# Altium PCB Bee Hive MainBoard PCB.PcbDoc
Units mm, origin at the board's own origin, x right, y up, seen from the top; angles counter-clockwise.
Board outline 90 x 57 mm, 2 copper layers (Top Layer, Bottom Layer), stack 1.671 mm thick; 26 components, 30 nets, 132 pads, 32 vias.
Unrouted connection lines stored in the file: 173.
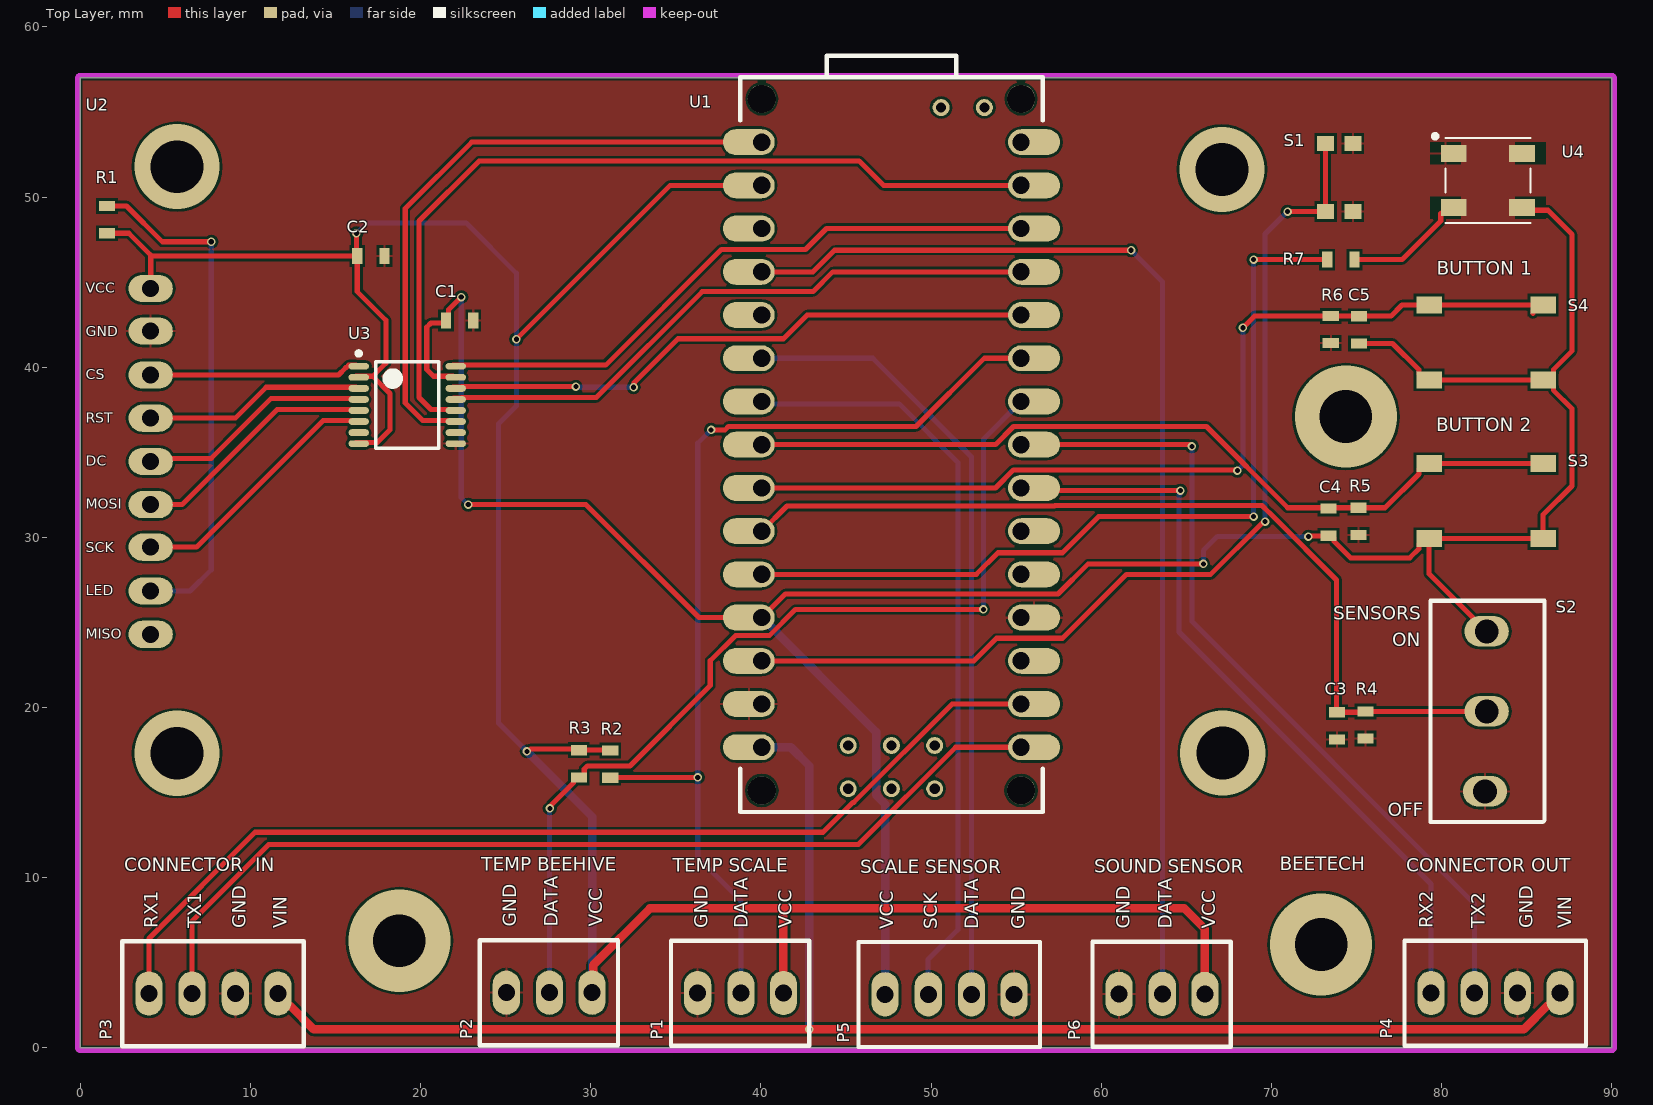
[diagram p0: Top Layer view]
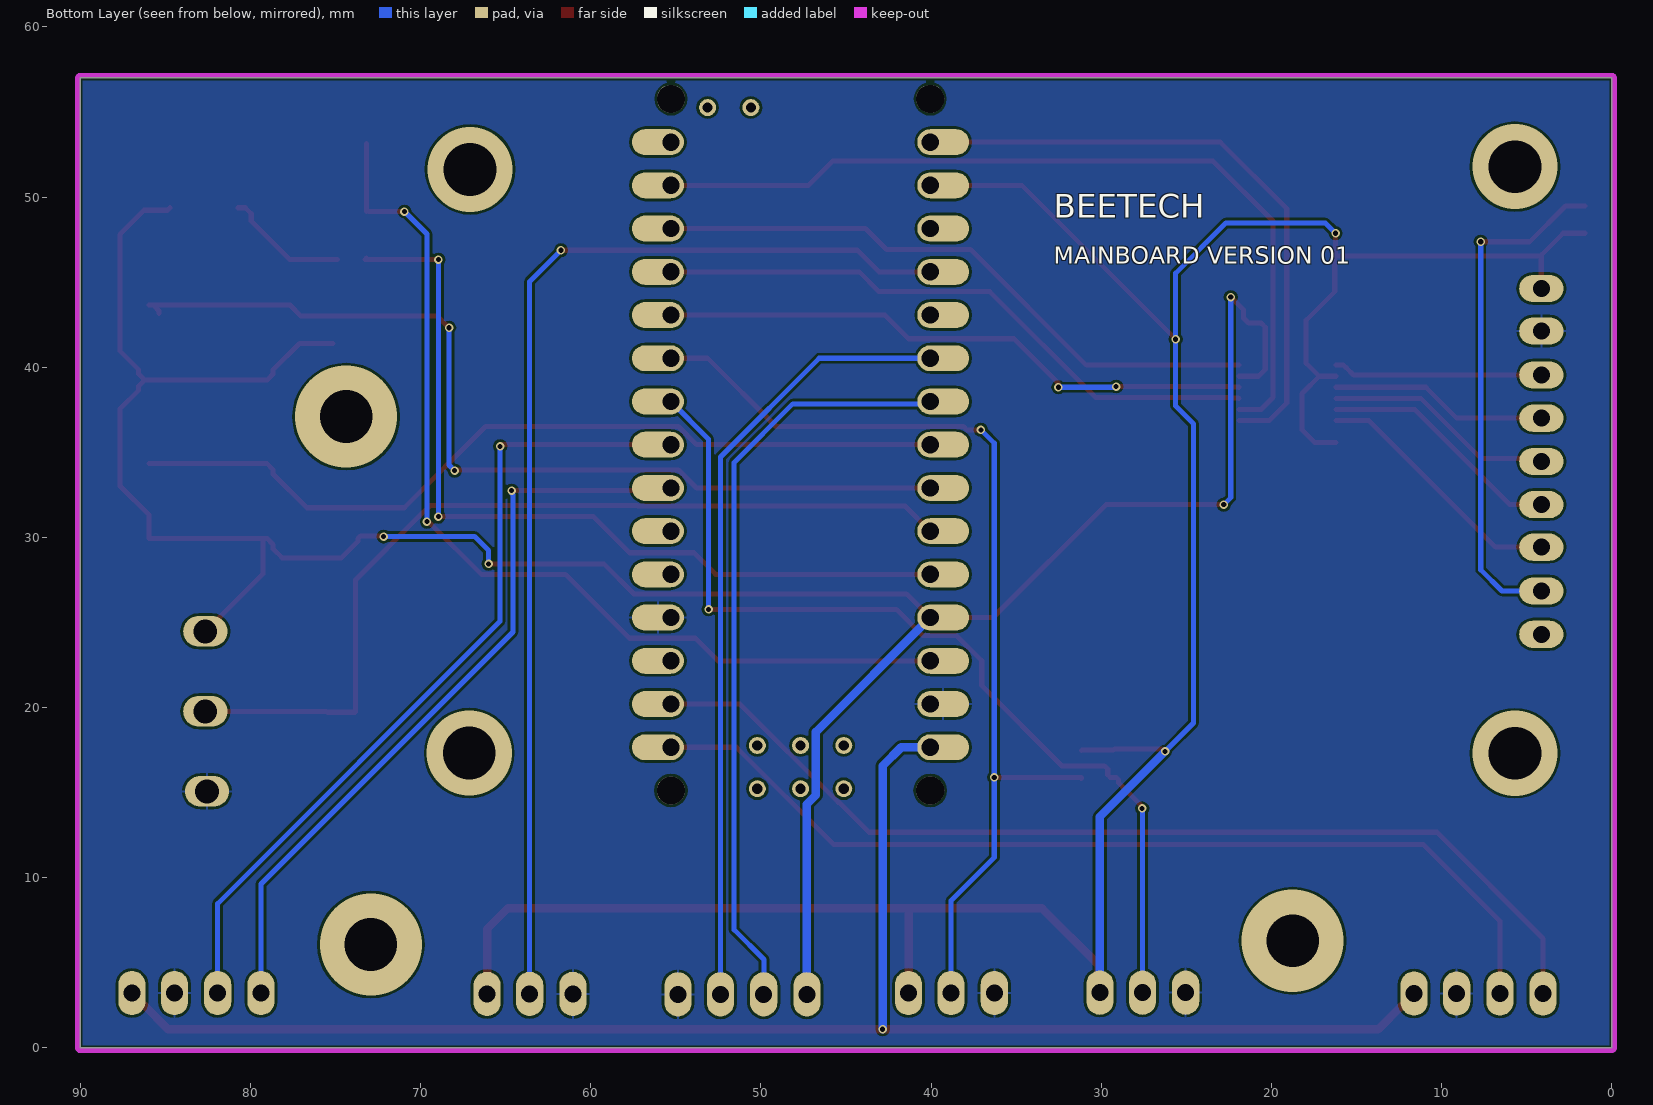
[diagram p1: Bottom Layer view, seen from below]
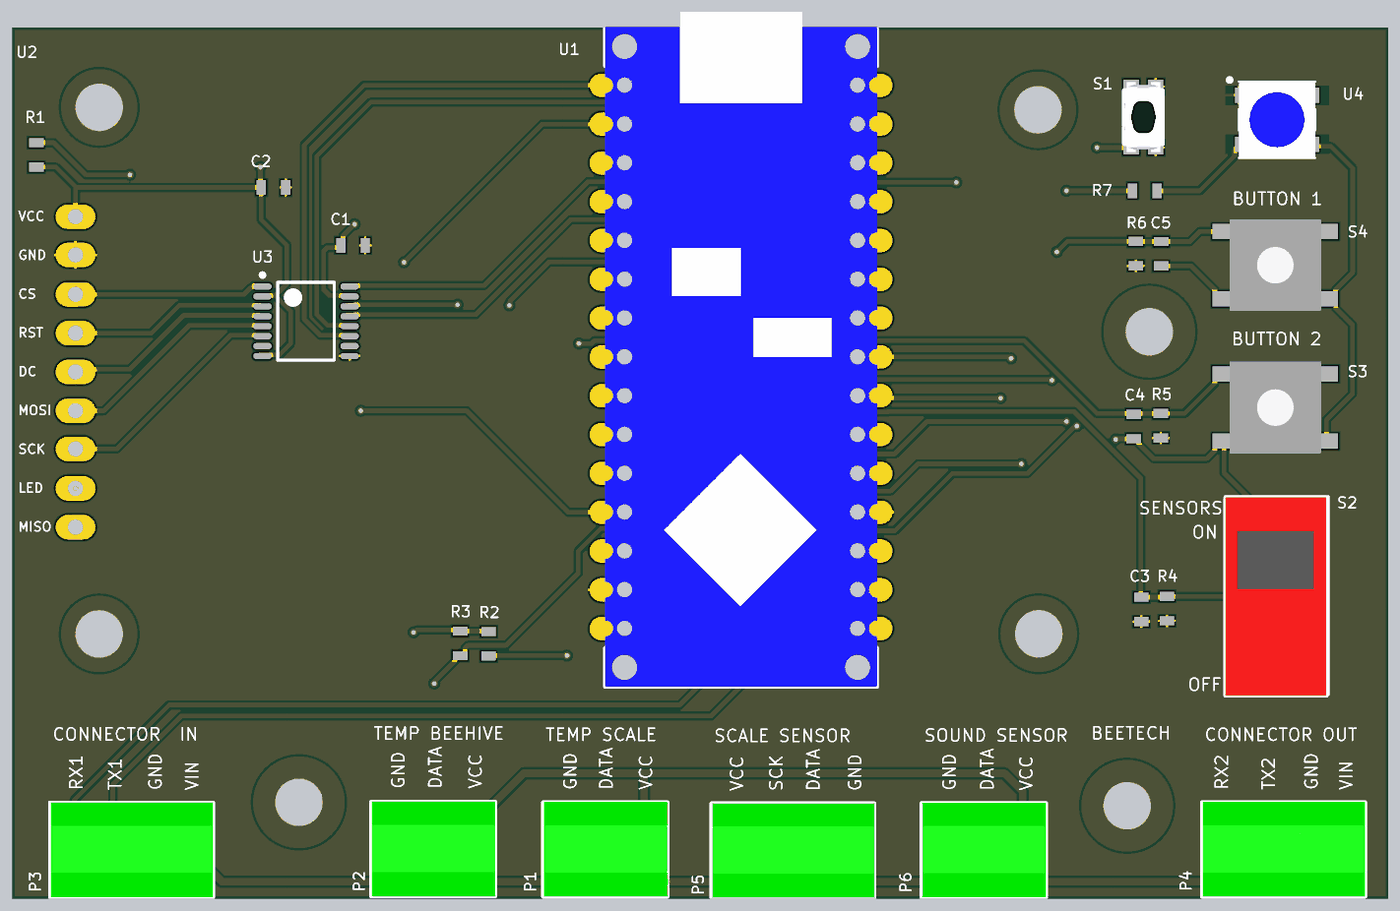
[diagram p2: 3D render of the assembled board from above, using the file's embedded part models]

## Layer stack, top to bottom
Top Solder: solder mask 0.0102, Solder Resist, Dk 3.5
Top Layer: signal copper 0.0356
Dielectric1: core 1.6, FR-4, Dk 4.8
Bottom Layer: signal copper 0.0356
Bottom Solder: solder mask 0.0102, Solder Resist, Dk 3.5

## Board outline
0,0 90,0 90,57 0,57

## Design rules (kind name [scope] priority, off if disabled: settings)
Clearance Clearance_1 [InNamedPolygon('SW_L01_P024')] p1: gap=0.254 ignorepadtopadclearanceinfootprint=FALSE except(0: Arc-Hole Track-Hole SMDPad-Hole THPad-Hole Via-Hole Fill-Hole Poly-Hole Region-Hole Text-Hole)
Clearance [All] p2: gap=0.15 ignorepadtopadclearanceinfootprint=FALSE
ComponentClearance [All] p1: gap=0.001 collisioncheckmode=3 verticalgap=0.254 showdistances=FALSE
FabricationTestPointUsage [All] p1 off: valid=0 allowmultiple=FALSE
FabricationTestpoint [All] p1 off: side=3 testpointundercomponent=TRUE minsize=1.016 maxsize=2.54 preferedsize=1.524 minholesize=0 maxholesize=1.016 preferedholesize=0.813 testpointgrid=0.025 allowsidetop=TRUE allowsidebottom=TRUE usegrid=TRUE gridtolerance=0
HoleSize [All] p1: absolutevalues=TRUE maxlimit=6 minlimit=0.025 maxpercent=80.000 minpercent=20.000
HoleToHoleClearance [All] p1: gap=0 allowstackedmicrovias=TRUE
MinimumSolderMaskSliver [All] p1: minsoldermaskwidth=0
PolygonConnect PolygonConnect_14 [All vs IsNamedPolygon('GND_L01_P041')] p1: connectstyle=Relief reliefconductorwidth=0.15 reliefentries=4 polygonreliefangle="90 Angle" airgapwidth=0.15
PolygonConnect V_BAT_L01_P036 [All vs IsNamedPolygon('V_BAT_L01_P036')] p2: connectstyle=Direct reliefconductorwidth=0.254 reliefentries=4 polygonreliefangle="90 Angle" airgapwidth=0.254
PolygonConnect V_BAT2 [All vs IsNamedPolygon('V_BAT2_L01_P004')] p3: connectstyle=Direct reliefconductorwidth=0.254 reliefentries=4 polygonreliefangle="90 Angle" airgapwidth=0.254
PolygonConnect V_BAT [All vs IsNamedPolygon('V_BAT_L01_P010')] p4: connectstyle=Direct reliefconductorwidth=0.254 reliefentries=4 polygonreliefangle="90 Angle" airgapwidth=0.254
PolygonConnect V_SYS2 [All vs IsNamedPolygon('V_SYS2_L01_P012')] p5: connectstyle=Direct reliefconductorwidth=0.254 reliefentries=4 polygonreliefangle="90 Angle" airgapwidth=0.254
PolygonConnect +3.3b_uBlox [All vs IsNamedPolygon('+3.3V_UBLOX_L01_P014')] p6: connectstyle=Direct reliefconductorwidth=0.254 reliefentries=4 polygonreliefangle="90 Angle" airgapwidth=0.254
PolygonConnect V_LIPO_SYS_L01_P016 [All vs IsNamedPolygon('V_LIPO_SYS_L01_P016')] p7: connectstyle=Direct reliefconductorwidth=0.254 reliefentries=4 polygonreliefangle="90 Angle" airgapwidth=0.254
PolygonConnect V_LIPO_SYS_L01_P020 [All vs IsNamedPolygon('V_LIPO_SYS_L02_P020')] p8: connectstyle=Direct reliefconductorwidth=0.254 reliefentries=4 polygonreliefangle="90 Angle" airgapwidth=0.254
PolygonConnect V_SYS_L02_P024 [All vs IsNamedPolygon('V_SYS_L02_P024')] p9: connectstyle=Direct reliefconductorwidth=0.254 reliefentries=4 polygonreliefangle="90 Angle" airgapwidth=0.254
PolygonConnect VCC_USB_5.0V_L01_P026 [All vs IsNamedPolygon('VCC_USB_5.0V_L01_P026')] p10: connectstyle=Direct reliefconductorwidth=0.254 reliefentries=4 polygonreliefangle="90 Angle" airgapwidth=0.254
PolygonConnect SW [All vs IsNamedPolygon('SW_L01_P008')] p11: connectstyle=Direct reliefconductorwidth=0.254 reliefentries=4 polygonreliefangle="90 Angle" airgapwidth=0.254
PolygonConnect [All] p12: connectstyle=Relief reliefconductorwidth=0.15 reliefentries=4 polygonreliefangle="90 Angle" airgapwidth=0.15
RoutingVias [All] p1: holewidth=0.3 width=0.5 viastyle="Through Hole" minholewidth=0.2 minwidth=0.3 maxholewidth=1.2 maxwidth=2 useviatemplates=TRUE viatemplateguid#1={68F519FB-439D-452A-8ACF-2DE296BA9197} viatemplateguid#2={5ED9683F-E5DF-4E78-BDB1-49E541A8EC46} viatemplateguid#3={FAFF2F81-81C9-46E2-9D3D-D8AEF9417303} viatemplateguid#4={175E6F9D-763D-42D4-A59E-C21ACC7DA2E1} viatemplatename#1=v50h30m0mx0 viatemplatename#2=v50h30m50mx0 viatemplatename#3=v50h20 viatemplatename#4=v50h20mx0
SilkToSilkClearance [All] p1: silktosilkclearance=0.152
SilkToSolderMaskClearance [IsPad] p1: minsilkscreentomaskgap=0.127 clearancetoexposedcopper=TRUE
SolderMaskExpansion [All] p1: expansion=0.102 istentingtop=FALSE
Width [All] p1: maxlimit=5.08 minlimit=0.01 preferedwidth=0.305 minimp=50.000000 maximp=50.000000 favimp=50.000000
22 further rules are at their usual default settings.

## Components (designator, comment, footprint, x,y, rotation, side; value= is the part's Value field where it differs from the comment)
C1 "100nF 0603_1" "CAP 0603" 22.294,42.753 r180 top value=100nF
C2 "100nF 0603_1" "CAP 0603" 17.081,46.542 r180 top value=100nF
C3 "100nF 0603" "CAP 0603" 73.85,18.925 r270 top value=100nF
C4 "100nF 0603" "CAP 0603" 73.348,30.895 r90 top value=100nF
C5 "100nF 0603" "CAP 0603" 75.149,42.202 r90 top value=100nF
P1 "3-Pin Right Angle Housing" "3PIN - RND 205-EK254-2.54-03P" 41.325,3.225 r270 top
P2 "3-Pin Right Angle Housing" "3PIN - RND 205-EK254-2.54-03P" 30.078,3.25 r270 top
P3 "4-Pin Right Angle Housing" "4PIN - RND 205-EK254-2.54-04P" 11.615,3.2 r270 top
P4 "4-Pin Right Angle Housing" "4PIN - RND 205-EK254-2.54-04P" 86.965,3.225 r270 top
P5 "4-Pin Right Angle Housing" "4PIN - RND 205-EK254-2.54-04P" 54.875,3.15 r270 top
P6 "3-Pin Right Angle Housing" "3PIN - RND 205-EK254-2.54-03P" 66.09,3.175 r270 top
R1 "0 Ohm 0603" "RES 0603 FOOTPRINT" 1.575,48.675 r270 top value=0
R2 "4.7k Ohm 0603" "RES 0603 FOOTPRINT" 31.15,16.675 r270 top value=4.7k
R3 "4.7k Ohm 0603" "RES 0603 FOOTPRINT" 29.3,16.7 r270 top value=4.7k
R4 "1k Ohm 0603" "RES 0603 FOOTPRINT" 75.525,18.978 r90 top value=1k
R5 "10k Ohm 0603" "RES 0603 FOOTPRINT" 75.123,30.945 r90 top value=10k
R6 "10k Ohm 0603" "RES 0603 FOOTPRINT" 73.489,42.22 r90 top value=10k
R7 "470 Ohm 0603" "RES 0603 FOOTPRINT" 74.075,46.325 r0 top value=470
S1 "Taster Print_SMD_2" "Taster Print - SMD - KMR241G LFS" 73.989,51.15 r270 top
S2 "Schiebeschalter 7A11-A1PCAE2" "schiebeschalter 7A11-A1PCAE2" 82.65,19.778 r0 top
S3 "Taster Print_SMD_3" "Taster Print RND 210-00212" 82.616,32.134 r0 top
S4 "Taster Print_SMD_3" "Taster Print RND 210-00212" 82.616,41.456 r0 top
U1 "Arduino Nano Every" "Arduino Nano Every" 38.78,57.04 r270 top locked
U2 "TFT 2.2 SPI 240x320" "TFT 2.2 SPI 240x320" 4.14,44.628 r0 top locked
U3 "TXB0106" TSSOP-16L 19.217,37.785 r0 top locked
U4 "neoPixel" "neoPixel 5050 adafruit 1655" 82.725,50.975 r180 top

## Footprints (in the part's own frame and the unit in brackets; to place one, negate y for a bottom-side part, rotate by r counter-clockwise, add the part's x,y. Pads: shape width x height; smd on the part's side, far side on the other; paste and mask are expansions set on the pad)
"3PIN - RND 205-EK254-2.54-03P" [mm] "RND 205-EK254-2.54-03P"
  oval 2.6x1.6 hole 1: 1(0,0) 2(0,-2.5) 3(0,-5.04)
  silkscreen extent -3.07,-6.6 3.1,1.52, body extent -3.1,-6.55 3.1,1.53, height 8.51
"4PIN - RND 205-EK254-2.54-04P" [mm] "RND 205-EK254-2.54-04P"
  oval 2.6x1.6 hole 1: 1(0,0) 2(0,-2.5) 3(0,-5.04) 4(0,-7.58)
  silkscreen extent -3.07,-9.14 3.1,1.52, body extent -3.1,-9.1 3.1,1.52, height 8.51
"Arduino Nano Every" [mil] "Arduino Nano Every"
  oval 60x120 hole 40 copper offset 0,-30: 1(150,50) 2(250,50) 3(350,50) 4(450,50) 5(550,50) 6(650,50) 7(750,50) 8(850,50) 9(950,50) 10(1050,50) 11(1150,50) 12(1250,50) 13(1350,50) 14(1450,50) 15(1550,50)
  oval 60x120 hole 40 copper offset 0,30: 16(1550,650) 16(1550,650) 17(1450,650) 18(1350,650) 19(1250,650) 20(1150,650) 21(1050,650) 22(950,650) 23(850,650) 24(750,650) 25(650,650) 26(550,650) 27(450,650) 28(350,650) 29(250,650) 30(150,650)
  round 39.37 hole 23.62: 50(70,565) 51(70,465) 61(1545.98,250) 62(1645.98,250) 63(1545.98,350) 64(1645.98,350) 65(1545.98,450) 66(1645.98,450)
  round 65 hole 65 unplated: MH1(50,650) MH2(50,50) MH3(1650,50) MH4(1650,650)
  silkscreen extent -50,0 1700,700, body extent -40,0 1700,700, height 136
"CAP 0603" [mm] "CAP 0603"
  rect 0.6x0.95 smd: 1(-0.8,0) 2(0.8,0)
  body extent -0.8,-0.4 0.8,0.4, height 0.8
"neoPixel 5050 adafruit 1655" [mm] "neoPixel 5050 adafruit 1655"
  rect 1.5x1 smd: 1(2,-1.6) 2(2,1.6) 3(-2,1.6) 4(-2,-1.6)
  silkscreen extent -2.5,-2.72 3.22,2.5, body extent -2.5,-2.5 2.5,2.5, height 2
"RES 0603 FOOTPRINT" [mm] "RES 0603 FOOTPRINT"
  rect 0.6x0.95 smd: 1(-0.8,0) 2(0.8,0)
  body extent -0.8,-0.4 0.8,0.4, height 0.8
"schiebeschalter 7A11-A1PCAE2" [mm] "schiebeschalter 7A11-A1PCAE2"
  oval 2.6x1.8 hole 1.4: 1(0,4.7) 2(0,0) 3(-0.1,-4.7)
  silkscreen extent -3.3,-6.5 3.4,6.5, body extent -3.3,-6.5 3.3,6.5, height 12.15
"Taster Print - SMD - KMR241G LFS" [mm] "http://ch.farnell.com/c-k-components/kmr241g-lfs/taster-smd-4n/dp/1437637"
  rect 0.9x1 smd: 1(-2,0.8) 2(-2,-0.8) 10(2,0.8) 20(2,-0.8)
  body extent -2.3,-1.4 2.3,1.4, height 1.93
"Taster Print RND 210-00212" [mm] "Taster Print RND 210-00212"
  rect 1.5x1 smd: 1(-3.35,2.2) 2(-3.35,-2.2) 3(3.35,2.2) 4(3.35,-2.2)
  body extent -3,-3 3,3, height 9.51
"TFT 2.2 SPI 240x320" [mm]
  oval 2.6x1.6 hole 1: 1(0,0) 2(0,-2.5) 3(0,-5.08) 4(0,-7.62) 5(0,-10.16) 6(0,-12.7) 7(0,-15.2) 8(0,-17.78) 9(0,-20.32)
  body extent -1.52,-30.16 65.98,9.84, height 14.41
TSSOP-16L [mm] "TSOP, 16-Leads, Body 5,00x4,40mm, Pitch 0,65mm, IPC High Density"
  oval 1.2x0.4 smd: 1(-2.85,2.275) 2(-2.85,1.625) 3(-2.85,0.975) 4(-2.85,0.325) 5(-2.85,-0.325) 6(-2.85,-0.975) 7(-2.85,-1.625) 8(-2.85,-2.275) 9(2.85,-2.275) 10(2.85,-1.625) 11(2.85,-0.975) 12(2.85,-0.325) 13(2.85,0.325) 14(2.85,0.975) 15(2.85,1.625) 16(2.85,2.275)
  silkscreen extent -2.97,-2.55 1.85,3.15, body extent -2.25,-2.55 2.25,2.55, height 1.2

## Part data
C1 C2 C3 C4 C5: "C CERAMIC SMD", Bezeichnung="C SMD", Haendler=Mouser, housing/footprint=0603
  C1 C2: Haendler Nr=603-CC0603JPX79BB104, Hersteller=Yageo, Hersteller Nr=CC0603JPX7R9BB104, Preis (CHF)=0.15, Umax=50V
  C3 C4 C5: Haendler Nr=710-885012206020, Hersteller=Würth, Hersteller Nr=885012206020, Preis (CHF)=0.05, Umax=10V
P1 P2 P6: library part "3-Pin Screw Terminal", "3-Pin", ComponentLink1Description=Mouser, ComponentLink1URL=https://www.mouser.ch/ProductDetail/TE-Connectivity/640453-2?qs=sGAEpiMZZMs%252bGHln7q6pm5E1Eb6qwPl2KIU5TYv3tVY%3d, Haendler=Distrelec, Haendler Nr=301-27-919, Preis (CHF)=0.60
P3 P4 P5: library part "4-Pin Screw Terminal", "4-Pin", ComponentLink1Description=Mouser, ComponentLink1URL=https://www.mouser.ch/ProductDetail/TE-Connectivity/640453-2?qs=sGAEpiMZZMs%252bGHln7q6pm5E1Eb6qwPl2KIU5TYv3tVY%3d, Haendler=Distrelec, Haendler Nr=301-27-920, Hersteller=RND, Hersteller Nr="RND 205-EK254-2.54-04P", Preis (CHF)=0.60
R1 R2 R3 R4 R5 R6 R7: "R SMD", Bezeichnung="R SMD", Haendler=Mouser, housing/footprint=0603
  R1: Haendler Nr=667-ERJ-3GEY0R00V, Hersteller=ERJ-3GEY0R00V, Hersteller Nr=Panasonic, Preis (CHF)=0.01
  R2 R3: Haendler Nr=755-ESR03EZPF4701, Preis (CHF)=0.01
  R4: Haendler Nr=71-CRCW06031K00FKEAC, Hersteller Nr=CRCW06031K00FKEAC, Preis (CHF)=0.01
  R5 R6: Haendler Nr=603-AC0603FR-0710KL, Hersteller=Yageo, Hersteller Nr=AC0603FR-0710KL, Preis (CHF)=0.01
  R7: Haendler Nr=594-MCT06030C4700FP5, Preis (CHF)=0.15
S1: "Taster", Haendler=Mouser, Haendler2=Farnell, Haendler2 Nr=1437637, Haendler Nr=611-KMR241GLFS, Hersteller=C&K, Hersteller Nr="KMR241G LFS", link=http://ch.farnell.com/c-k-components/kmr241g-lfs/taster-smd-4n/dp/1437637, Link Hersteller=http://www.ckswitches.com/products/switches/product-details/Tactile/KMR2/KMR241NGLFS/, Preis (CHF)=0.5
S3 S4: library part "Taster Print_SMD_5", "Taster", ComponentLink1Description=link, ComponentLink1URL=https://www.digikey.ch/product-detail/de/wurth-electronics-inc/430473035826/732-7021-1-ND/5225469, Haendler=Distrelec, Haendler Nr=300-90-668, link=https://www.distrelec.ch/de/printtaster-210-schliesser-45n-6mm-rnd-components-rnd-210-00212/p/30090668?q=PRINTTASTER&pos=2&origPos=45&origPageSize=100&track=true, Preis (CHF)=0.38
U1: "https://store.arduino.cc/nano-every-pack", ComponentLink3URL=http://ch.farnell.com/stmicroelectronics/stm32l496vgt6/mcu-arm-cortex-m4-80mhz-lqfp-100/dp/2725139?st=STM32L496VGT6, Haendler=Mouser, Haendler Nr=782-ABX00028, link=https://store.arduino.cc/nano-every-pack, Link 2=https://www.mouser.ch/ProductDetail/Arduino/ABX00028?qs=PzGy0jfpSMtit6rnFl8mVg%3D%3D, Preis (CHF)=11.21
U2: "https://www.banggood.com/1_441_82_02_22_4-Inch-TFT-LCD-Display-Module-Colorful-Screen-Module-SPI-Interface-p-1494883.html?rmmds=search&ID=6211522&cur_warehouse=CN", ComponentLink3URL=http://ch.farnell.com/stmicroelectronics/stm32l496vgt6/mcu-arm-cortex-m4-80mhz-lqfp-100/dp/2725139?st=STM32L496VGT6, Haendler="Banggood / Aliexpress", link=https://www.banggood.com/1_441_82_02_22_4-Inch-TFT-LCD-Display-Module-Colorful-Screen-Module-SPI-Interface-p-1494883.html?rmmds=search&ID=6211522&cur_warehouse=CN, Link 2=https://de.aliexpress.com/item/4000839144387.html?spm=a2g0o.productlist.0.0.48ed5371jjv3wJ&algo_pvid=f087815a-197e-468a-8055-d99fc6734484&algo_expid=f087815a-197e-468a-8055-d99fc6734484-8&btsid=0ab50f6115912653966648062e4a8e&ws_ab_test=searchweb0_0,searchweb201602_,searchweb201603_, Preis (CHF)=6
U3: library part "TXB0106 Level Converter", "Level Converter TXB0106", Haendler=Mouser, Haendler2=Farnell, Haendler2 Nr=1694679, Haendler Nr=595-TXB0106PWR, Hersteller="Texas Instruments", Hersteller Nr=TXB0106, link=http://ch.farnell.com/texas-instruments/txb0106pwr/txb-transceiver-tssop16/dp/1694679?ost=1694679&searchView=table&iscrfnonsku=false&ddkey=http%3Ade-CH%2FElement14_Switzerland%2Fsearch, Preis (CHF)=1.45
U4: library part "neoPixel 5050 adafruit 1655", "neoPixel 5050 adafruit 1655", ComponentLink1Description=Mouser, ComponentLink1URL=https://www.mouser.ch/ProductDetail/TE-Connectivity/640453-2?qs=sGAEpiMZZMs%252bGHln7q6pm5E1Eb6qwPl2KIU5TYv3tVY%3d, Haendler=Mouser, Haendler Nr=485-1655, Hersteller=Adafruit, Hersteller Nr=1655, Preis (CHF)=0.60
S2: Haendler=Distrelec, Haendler Nr=124-50-166

## Via types
v1: diameter 0.5, hole 0.3, Top Layer to Bottom Layer, tented both sides, 25 vias
v2: diameter 5, hole 3.1, Top Layer to Bottom Layer, tented both sides, 4 vias
v3: diameter 6, hole 3.1, Top Layer to Bottom Layer, 3 vias

## Nets (pads, with @x,y where several pads share a name; then routed paths per layer and width w, separated by ;. In a path a pad name is that pad's centre, name@x,y a point inside that pad or via, vN(x,y) a via of type N, cw(c..) or ccw(c..) an arc to the next point about the centre after c; other vN are vias at no path point)
BUTTON_1: C4.2 R5.2 S3.1 S3.3 U1.8 | length 49.5
  Top Layer w0.3: U1.8 53.788,35.45 54.85,36.512 66.188,36.512 70.955,31.745 73.298,31.745 C4.2 ; C4.2@73.398,31.745 R5.2 76.677,31.745 78.666,33.734 78.666,33.984 79.016,34.334 S3.1 S3.3
BUTTON_2: C5.2 R6.2 S4.1 S4.3 U1.9 | length 55.8
  Top Layer w0.3: U1.9 53.788,32.91 54.85,33.972 67.809,33.972 67.819,33.962 67.96,33.962 v1(67.999,33.924) ; v1(68.325,42.325) 69.02,43.02 R6.2 73.508,43.002 C5.2 77.021,43.002 77.675,43.656 S4.1 S4.3@85.716,43.656 ; S4.3@85.366,43.166 85.366,43.306 S4.3@85.716,43.656 ; S4.3 S4.3@85.716,43.656
  Bottom Layer w0.3: v1(67.999,33.924) 68.325,34.25 v1(68.325,42.325)
CS: U1.28 U3.16 | length 36.7
  Top Layer w0.3: U3.16@21.909,40.125 30.875,40.125 37.675,46.925 42.625,46.925 43.85,48.15 U1.28
"CS TFT": U2.3 U3.1 | length 12.4
  Top Layer w0.3: U2.3@4.171,39.517 U2.3 15.174,39.548 15.602,39.975 15.632,39.975 15.782,40.125 U3.1@16.209,40.125
DATA_TEMP_1: P1.2 R2.2 U1.25 | length 59.7
  Top Layer w0.3: R2.2@31.175,15.85 R2.2 31.175,15.9 v1(36.285,15.9) ; v1(37.075,36.325) 37.899,36.325 38.086,36.512 49.113,36.512 53.131,40.53 U1.25
  Bottom Layer w0.3: v1(37.075,36.325) 36.285,35.535 v1(36.285,15.9) 36.285,11.19 38.825,8.65 P1.2 P1.2@38.775,3.275
DATA_TEMP_2: P2.2 R3.2 U1.24 | length 55.5
  Top Layer w0.3: v1(27.6,14.075) 27.638,14.113 27.638,14.238 28.975,15.575 28.975,15.75 29.125,15.9 R3.2 29.468,15.9 29.618,16.05 29.618,16.393 29.8,16.575 32.3,16.575 37.025,21.3 37.025,22.751 38.502,24.228 40.49,24.228 42.037,25.775 v1(53.075,25.775)
  Bottom Layer w0.3: P2.2 27.578,14.053 v1(27.6,14.075) ; v1(53.075,25.775) 53.075,35.775 U1.24
DC: U1.27 U3.13 | length 36.5
  Top Layer w0.3: U3.13@21.909,38.175 21.928,38.194 22.399,38.194 22.421,38.217 30.326,38.217 36.552,44.444 43.06,44.444 44.226,45.61 U1.27
"DC TFT": U2.5 U3.4 | length 13.6
  Top Layer w0.3: U2.5 4.322,34.65 7.7,34.65 11.225,38.175 U3.4@16.209,38.175
DT_HX711: P5.2 U1.6 | length 46.3
  Bottom Layer w0.3: U1.6 46.573,40.53 52.375,34.728 P5.2
GND: C1.1 C2.1 C3.2 P1.3 P2.3 P3.2 P4.2 P5.1 P6.3 R4.1 R5.1 R6.1 S1.1 S1.10 S2.3 U1.14 U1.19 U2.2 U3.9 U4.1
"LED TFT": R1.1 U2.8 | length 30.3
  Top Layer w0.3: R1.1 2.725,49.475 4.825,47.375 v1(7.7,47.375)
  Bottom Layer w0.3: v1(4.14,26.848) 6.448,26.848 7.7,28.1 v1(7.7,47.375)
MOSI: U1.29 U3.12 | length 50.1
  Top Layer w0.3: U3.12@21.909,37.525 20.613,37.525 19.91,38.228 19.91,48.591 23.444,52.125 45.775,52.125 47.21,50.69 U1.29
"MOSI TFT": U2.6 U3.5 | length 14.4
  Top Layer w0.3: U2.6 4.143,31.925 5.975,31.925 11.575,37.525 U3.5@16.209,37.525
NEO_PIX_DATA: R7.1 U1.11 | length 49.9
  Top Layer w0.3: U1.11 52.655,27.83 53.925,29.1 57.725,29.1 59.85,31.225 v1(68.95,31.225) ; v1(68.95,46.325) R7.1 R7.1@73.175,46.425
  Bottom Layer w0.3: v1(68.95,31.225) v1(68.95,46.325)
NetR7_2: R7.2 U4.2 | length 7.4
  Top Layer w0.3: R7.2 77.675,46.325 79.951,48.601 79.951,49.025 80.301,49.375 U4.2
RESETN: S1.2 S1.20 U1.13 | length 58
  Top Layer w0.3: U1.13 52.525,22.75 53.85,24.075 57.725,24.075 61.48,27.83 66.43,27.83 69.425,30.825 69.471,30.825 69.571,30.925 v1(69.625,30.925) ; v1(70.95,49.15) 73.039,49.15 73.114,49.225 S1.20 S1.2
  Bottom Layer w0.3: v1(69.625,30.925) 69.625,47.825 v1(70.95,49.15)
RST: U1.26 U3.14 | length 35.3
  Top Layer w0.3: U3.14@21.909,38.825 21.928,38.844 22.399,38.844 22.421,38.867 v1(29.125,38.867) ; v1(32.516,38.825) 32.554,38.863 32.554,39.102 35.127,41.675 41.325,41.675 42.72,43.07 U1.26
  Bottom Layer w0.3: v1(29.125,38.867) 29.167,38.825 v1(32.516,38.825)
"RST TFT": U2.4 U3.3 | length 12.8
  Top Layer w0.3: U2.4 9.108,37.008 10.925,38.825 U3.3@16.209,38.825
"RX 1": P3.4 U1.17 | length 60.2
  Top Layer w0.3: P3.4 4.035,6.435 10.275,12.675 43.65,12.675 45.407,14.432 45.461,14.432 51.239,20.21 U1.17
"RX 2": P4.4 U1.22 | length 45.1
  Top Layer w0.3: U1.22 55.45,32.75 v1(64.65,32.75)
  Bottom Layer w0.3: v1(64.65,32.75) 64.612,32.712 64.612,32.57 64.575,32.534 64.575,24.45 79.385,9.64 P4.4
SCK: U1.1 U3.11 | length 37.3
  Top Layer w0.3: U3.11@21.909,36.875 20.126,36.875 19.1,37.901 19.1,49.325 23.005,53.23 U1.1 U1.1@40.03,53.25
"SCK TFT": U2.7 U3.6 | length 15.2
  Top Layer w0.3: U2.7 6.828,29.428 14.275,36.875 U3.6@16.209,36.875
SCK_HX711: P5.3 U1.7 | length 45
  Bottom Layer w0.3: U1.7 40.19,37.85 48.125,37.85 51.573,34.402 51.573,6.948 49.825,5.2 49.825,3.16 P5.3
SOUND_DATA: P6.2 U1.4 | length 66.7
  Top Layer w0.3: U1.4 43.06,45.61 44.325,46.875 v1(61.75,46.875)
  Bottom Layer w0.3: v1(61.75,46.875) 63.59,45.035 P6.2
SWITCH: C3.1 R4.2 S2.2 U1.10 | length 52.8
  Top Layer w0.3: U1.10 41.528,31.848 57.254,31.848 57.281,31.875 69.45,31.875 69.85,31.475 69.853,31.475 70.175,31.153 70.175,31.15 73.825,27.5 73.825,19.75 C3.1 75.472,19.725 R4.2 S2.2
"TX 1": P3.3 U1.16 | length 57.2
  Top Layer w0.3: P3.3 6.575,7.198 6.572,7.201 6.572,7.449 11.073,11.95 45.725,11.95 51.445,17.67 U1.16@55.29,17.67
"TX 2": P4.3 U1.23 | length 49.1
  Top Layer w0.3: U1.23 65.171,35.45 65.271,35.35 v1(65.325,35.35)
  Bottom Layer w0.3: v1(65.325,35.35) 65.328,35.347 65.328,25.075 81.925,8.478 P4.3
"V IN": P3.1 P4.1 U1.15 | length 96.1
  Top Layer w0.5: P3.1 11.615,2.998 12.123,2.49 12.326,2.49 13.715,1.1 v1(42.849,1.1) 84.84,1.1 86.255,2.515 86.457,2.515 86.965,3.023 P4.1
  Bottom Layer w0.5: U1.15 41.754,17.67 42.849,16.575 v1(42.849,1.1)
"VCC 3.3V": C2.2 P1.1 P2.1 P6.1 R1.2 R2.1 R3.1 U1.2 U2.1 U3.2 U3.8 | length 160.8
  Top Layer w0.3: R1.2 2.85,47.875 4.14,46.585 ; U2.1 4.14,46.585 ; U3.8@16.209,35.575 17.459,35.575 18.209,36.325 18.209,38.459 17.193,39.475 ; U3.2@16.209,39.475 17.193,39.475 ; v1(16.233,47.875) 16.233,46.59 C2.2 ; v1(25.626,41.649) 34.667,50.69 U1.2 ; v1(26.25,17.425) 26.304,17.425 26.454,17.575 29.225,17.575 R3.1 31.125,17.5 R2.1 ; 4.14,46.585 4.183,46.542 C2.2 ; C2.2 16.281,44.444 17.956,42.769 17.956,40.239 17.193,39.475
  Top Layer w0.5: P2.1 30.147,3.32 30.147,4.872 33.475,8.2 41.325,8.2 ; P1.1 41.325,8.2 ; P6.1 66.09,6.997 64.887,8.2 41.325,8.2
  Bottom Layer w0.3: v1(16.233,47.875) 16.835,48.477 22.68,48.477 25.626,45.531 v1(25.626,41.649) 25.626,37.726 24.575,36.675 24.575,28.925 24.575,19.1 v1(26.25,17.425)
  Bottom Layer w0.5: v1(26.25,17.425) 30.078,13.597 P2.1
"VCC 5V": C1.2 C4.1 C5.1 P5.4 S2.1 S3.2 S3.4 S4.2 S4.4 U1.12 U3.15 U4.3 | length 156.7
  Top Layer w0.3: U3.15@21.909,39.475 20.759,39.475 20.36,39.874 20.36,42.354 20.613,42.607 21.348,42.607 C1.2 21.644,42.903 21.644,43.38 v1(22.392,44.128) ; v1(22.8,31.928) 29.722,31.928 36.36,25.29 U1.12 41.435,26.675 57.461,26.675 59.236,28.45 v1(66,28.45) ; v1(72.175,30.05) 72.229,30.05 72.274,30.095 C4.1 73.523,30.095 73.673,29.945 73.673,29.77 74.643,28.8 78.132,28.8 78.666,29.334 78.666,29.584 79.016,29.934 S3.2 ; C5.1 77.12,41.402 78.666,39.856 78.666,39.606 79.016,39.256 S4.2 S4.4 S4.4@86.216,39.256 ; S2.1 79.266,27.862 S3.2 ; U4.3 84.874,49.226 86.249,49.226 87.675,47.8 87.675,40.965 86.566,39.856 86.566,39.606 S4.4@86.216,39.256 ; S3.2 S3.4 85.966,31.332 87.659,33.025 87.659,37.563 86.566,38.656 86.566,38.906 S4.4@86.216,39.256
  Bottom Layer w0.3: v1(22.392,44.128) 22.392,32.336 v1(22.8,31.928) ; v1(66,28.45) 66,29.23 66.82,30.05 v1(72.175,30.05)
  Bottom Layer w0.5: U1.12 46.77,18.57 46.77,14.859 47.295,14.334 P5.4
pads on no net: U1.3 U1.5 U1.18 U1.20 U1.21 U1.30 U1.50 U1.51 U1.61 U1.62 U1.63 U1.64 U1.65 U1.66 U1.MH1 U1.MH2 U1.MH3 U1.MH4 U2.9 U3.7 U3.10 U4.4
copper on no net:
  other v2: 5.69,17.318 67.14,17.328 67.09,51.628 5.69,51.788
  other v3: 72.925,6.073 18.75,6.298 74.375,37.1

## Polygon pours and split planes (outlines as drawn)
GND on Top Layer "GND_L01_P000" (solid, pour order 0): 0,0 90,0 90,57 0,57
GND on Bottom Layer "GND_L02_P001" (solid, pour order 1): 0,0 90,0 90,57 0,57

## Keep-outs
Keep-Out Layer:
  lines w0.3: -0.15,0 ccw(c0,0) 0,-0.15 ; -0.15,0 ccw(c0,0) 0,-0.15 ; -0.15,0 -0.15,57 ; -0.15,57 cw(c0,57) 0,57.15 ; -0.15,57 cw(c0,57) 0,57.15 ; 0,-0.15 90,-0.15 ; 0,57.15 90,57.15 ; 90,-0.15 ccw(c90,0) 90.15,0 ; 90,-0.15 ccw(c90,0) 90.15,0 ; 90,57.15 cw(c90,57) 90.15,57 ; 90,57.15 cw(c90,57) 90.15,57 ; 90.15,0 90.15,57

## Silkscreen, mask and mechanical layers (free items; w line width, h text height)
Top Overlay:
  text "BUTTON 1" at 79.725,45.425 h0.8
  text "BUTTON 2" at 79.675,36.25 h0.8
  text "SENSORS" at 73.625,25.175 h0.8
  text "ON" at 77.1,23.6 h0.8
  text "OFF" at 76.825,13.625 h0.8
  text "BEETECH" at 70.497,10.45 h0.8
  text "TEMP BEEHIVE" at 23.574,10.425 h0.8
  text "CONNECTOR  IN" at 2.571,10.375 h0.8
  text "TEMP SCALE" at 34.821,10.35 h0.8
  text "CONNECTOR OUT" at 77.921,10.35 h0.8
  text "SCALE SENSOR" at 45.831,10.275 h0.8
  text "SOUND SENSOR" at 59.586,10.3 h0.8
  text "GND" at 25.625,7.122 h0.8 r90
  text "DATA" at 28.05,7.122 h0.8 r90
  text "VCC" at 30.675,7.122 h0.8 r90
  text "GND" at 36.875,7.047 h0.8 r90
  text "DATA" at 39.23,7.047 h0.8 r90
  text "VCC" at 41.825,7.047 h0.8 r90
  text "RX2" at 79.485,7.047 h0.8 r90
  text "TX2" at 82.55,7.047 h0.8 r90
  text "GND" at 85.35,7.047 h0.8 r90
  text "VIN" at 87.625,7.047 h0.8 r90
  text "RX1" at 4.565,7.022 h0.8 r90
  text "TX1" at 7.115,7.022 h0.8 r90
  text "GND" at 9.74,7.022 h0.8 r90
  text "VIN" at 12.14,7.022 h0.8 r90
  text "GND" at 61.675,6.997 h0.8 r90
  text "DATA" at 64.15,6.997 h0.8 r90
  text "VCC" at 66.7,6.997 h0.8 r90
  text "VCC" at 47.775,6.972 h0.8 r90
  text "SCK" at 50.35,6.972 h0.8 r90
  text "DATA" at 52.775,6.972 h0.8 r90
  text "GND" at 55.5,6.972 h0.8 r90
Bottom Overlay:
  text "BEETECH" at 32.8,48.775 h1.4
  text "MAINBOARD VERSION 01" at 32.8,46.093 h1

## Text inside footprints (layer, text, board x,y; h text height)
U2: Top Overlay "DC" at 0.33,34.214 h0.6; Top Overlay "RST" at 0.33,36.754 h0.6; Top Overlay "VCC" at 0.33,44.374 h0.6; Top Overlay "GND" at 0.33,41.834 h0.6; Top Overlay "CS" at 0.33,39.294 h0.6; Top Overlay "LED" at 0.33,26.594 h0.6; Top Overlay "SCK" at 0.33,29.134 h0.6; Top Overlay "MOSI" at 0.33,31.674 h0.6; Top Overlay "MISO" at 0.33,24.054 h0.6